# Altium PCB PC_ind_board.PcbDoc
Units mil, origin at the board's own origin, x right, y up, seen from the top; angles counter-clockwise.
Board outline 2800 x 730 mil, 2 copper layers (Top Layer, Bottom Layer), stack 61.811 mil thick; 5 components, 6 nets, 20 pads, 1 vias.
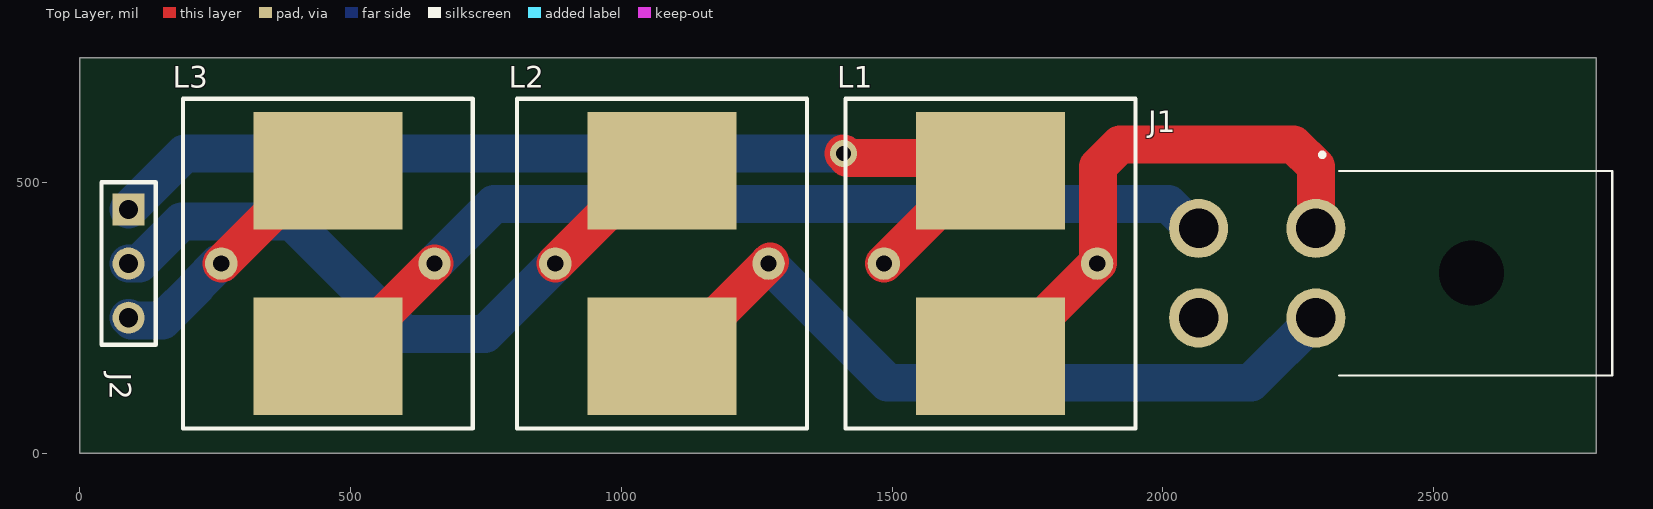
[diagram p0: Top Layer view]
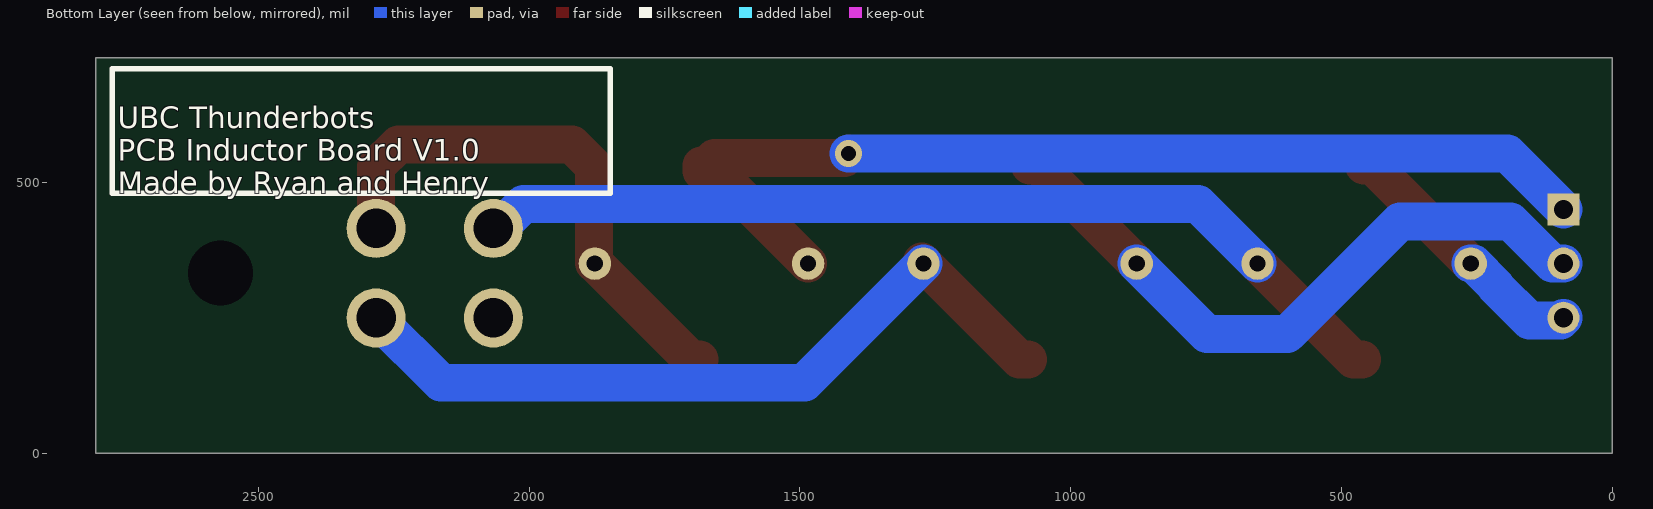
[diagram p1: Bottom Layer view, seen from below]

## Layer stack, top to bottom
Top Solder: solder mask 0.4, Solder Resist, Dk 3.5
Top Layer: signal copper 1.378
Dielectric 1: dielectric 59.0551, FR-4, Dk 4.8
Bottom Layer: signal copper 1.378
Bottom Solder: solder mask 0.4, Solder Resist, Dk 3.5

## Board outline
0,730 0,0 2800,0 2800,730

## Design rules (kind name [scope] priority, off if disabled: settings)
BoardOutlineClearance [All] p1: gap=7.87 ignorepadtopadclearanceinfootprint=FALSE except(15.75: Arc-SplitBarrior Arc-SplitContinuation Track-SplitBarrior Track-SplitContinuation SMDPad-SplitBarrior SMDPad-SplitContinuation THPad-SplitBarrior THPad-SplitContinuation Via-SplitBarrior Via-SplitContinuation Fill-SplitBarrior Fill-SplitContinuation Poly-SplitBarrior Poly-SplitContinuation Region-SplitBarrior Region-SplitContinuation Text-SplitBarrior Text-SplitContinuation)
Clearance "Clearance Bottom Layer" [OnLayer('Bottom Layer')] p1: gap=8 ignorepadtopadclearanceinfootprint=TRUE except(10: Arc-Text Track-Text SMDPad-Text THPad-Text Via-Text Fill-Text Poly-Text Region-Text Text-Text)
Clearance "Clearance Top Layer" [OnLayer('Top Layer')] p2: gap=8 ignorepadtopadclearanceinfootprint=TRUE except(10: Arc-Text Track-Text SMDPad-Text THPad-Text Via-Text Fill-Text Poly-Text Region-Text Text-Text)
Clearance [All] p3: gap=7.87 ignorepadtopadclearanceinfootprint=FALSE except(3.5: Arc-Arc Arc-Track Arc-SMDPad Track-Track Track-SMDPad SMDPad-SMDPad; 5: Arc-Via Track-Via SMDPad-Via THPad-Via Via-Via; 10: Arc-Text Track-Text SMDPad-Text THPad-Text Via-Text Fill-Text Poly-Text Region-Text Text-Text)
HoleSize [All] p1: absolutevalues=TRUE maxlimit=248.03 minlimit=7.87 maxpercent=80.000 minpercent=20.000
MinimumAnnularRing [All] p1: minimumring=3
MinimumSolderMaskSliver [All] p1: minsoldermaskwidth=3.94
PolygonConnect PolygonConnect_1 [All] p1: thpad.connectstyle=Relief thpad.reliefconductorwidth=20 thpad.reliefentries=4 thpad.polygonreliefangle="90 Angle" thpad.airgapwidth=10 smdpad.connectstyle=Relief smdpad.reliefconductorwidth=20 smdpad.reliefentries=4 smdpad.polygonreliefangle="90 Angle" smdpad.airgapwidth=10 via.connectstyle=Direct via.reliefconductorwidth=20 via.reliefentries=4 via.polygonreliefangle="90 Angle" via.airgapwidth=10
RoomDefinition SCH_Inductor_board [InComponentClass('SCH_Inductor_board')] p1: confinementstyle=ConfineIn formatcopy=TRUE lockcomponents=FALSE outline -5,-35 2880,-35 2880,760 -5,760
RoutingCorners [All] p1: cornerstyle=Round minsetback=100 maxsetback=100
RoutingVias [All] p1: holewidth=19.68 width=39.37 viastyle="Through Hole" minholewidth=7.87 minwidth=17.72 maxholewidth=39.37 maxwidth=78.74
SilkToSilkClearance [All] p1: silktosilkclearance=3.94
SilkToSolderMaskClearance [IsPad] p1: minsilkscreentomaskgap=3.94 clearancetoexposedcopper=TRUE
SolderMaskExpansion [All] p1: expansion=4 istentingtop=FALSE
Width [All] p1: maxlimit=100 minlimit=3.5 preferedwidth=15
25 further rules are at their usual default settings.

## Components (designator, comment, footprint, x,y, rotation, side; value= is the part's Value field where it differs from the comment)
J1 "CN HDR 4POS Molex 26013115 (R)" 26013115 2570,332.28 r90 top
J2 "Header 3" HDR1X3 90,450 r270 top
L1 "56 UH" "EATON _HCM1A1307V2-560-R"#1 1681.85,350 r90 top value="56 µH"
L2 "56 UH" "EATON _HCM1A1307V2-560-R"#2 1075,350 r90 top value="56 µH"
L3 "56 UH" "EATON _HCM1A1307V2-560-R"#2 458.15,350 r90 top value="56 µH"

## Footprints (in the part's own frame and the unit in brackets; to place one, negate y for a bottom-side part, rotate by r counter-clockwise, add the part's x,y. Pads: shape width x height; smd on the part's side, far side on the other; paste and mask are expansions set on the pad)
26013115 [mm]
  round 2.775 hole 1.85: 1(2.1,7.3) 2(-2.1,7.3) 3(2.1,12.8) 4(-2.1,12.8)
  round 1.525 hole 3.05 unplated: MH1(0,0)
  silkscreen extent -4.8,-6.6 5.6,7.05, body extent -4.8,-6.5 5.2,13.44, height 11.5
"EATON _HCM1A1307V2-560-R"#1 [mm] "FIXED IND 56UH 4A 65 mOHM SMD"
  rect 5.5x7 smd: 1(-4.35,0) 2(4.35,0)
  round 1.524 hole 0.762: 1(0,-5) 2(0,5)
  Top Layer lines w0.254: -4.6,0 -4.6,-0.4 ; 0,-4.6 0,-5 ; 0,5 0,4.6 0,5
  Top Layer lines w1.778: 0,5 4.6,0.4 4.6,0.25 4.6,0 ; -4.5,-0.1 -4.5,-0.5 0,-5
  silkscreen extent -7.73,-6.8 7.73,6.8
"EATON _HCM1A1307V2-560-R"#2 [mm] "FIXED IND 56UH 4A 65 mOHM SMD"
  rect 5.5x7 smd: 1(-4.35,0) 2(4.35,0)
  round 1.524 hole 0.762: 1(0,-5) 2(0,5)
  Top Layer lines w0.254: -4.6,0 -4.6,-0.4 ; 0,-4.6 0,-5 ; 0,5 0,4.6 0,5
  Top Layer lines w1.778: 0,5 4.6,0.4 4.6,0 ; -4.5,-0.1 -4.5,-0.5 0,-5
  silkscreen extent -7.73,-6.8 7.73,6.8
HDR1X3 [mm] "Connector; Header; 3 Position"
  rect 1.5x1.5 hole 0.9: 1(0,0)
  round 1.5 hole 0.9: 2(2.54,0) 3(5.08,0)
  silkscreen extent -1.27,-1.27 6.35,1.27

## Part data
J1: "Molex 26013115 4POS Minifit / dual row, right angle"
J2: "Header, 3-Pin", LatestRevisionDate=17-Jul-2002, LatestRevisionNote="Re-released for DXP Platform.", Publisher="Altium Limited"
L1 L2 L3: library part "IND 56UH 4A 65 mOHM SMD", "FIXED!! IND 56UH 4A 65 MOHM SMD Shielded - Inductor 65mOhm Max Nonstandard -", Current Rating=4A, DC Resistance=65mOhm, Digi-Key Part Number=283-HCM1A1307V2-560-RTR-ND, Supplier Part Number 1=283-HCM1A1307V2-560-RCT-ND, Supplier 1=Digi-Key

## Via types
v1: diameter 50, hole 28, Top Layer to Bottom Layer, 1 vias

## Nets (pads, with @x,y where several pads share a name; then routed paths per layer and width w, separated by ;. In a path a pad name is that pad's centre, name@x,y a point inside that pad or via, vN(x,y) a via of type N, cw(c..) or ccw(c..) an arc to the next point about the centre after c; other vN are vias at no path point)
"BOARD 1 CN": J1.1 L1.1 | length 721.6
  Top Layer w70: L1.1@1878.7,350 1880,351.3 1880,528.99 1921.01,570 2241.59,570 2282.6,528.99 2282.6,425.58 J1.1@2284.06,424.13
"BOARD 2 CN": J1.2 L2.1 | length 1156.8
  Top Layer w70: L2.1@1271.85,350 1271.85,350.89 L2.1@1275,354.03
  Bottom Layer w70: L2.1@1271.85,350 1491.85,130 2162.99,130 J1.2
"BOARD 3 CN": J1.3 L3.1 | length 1475.3
  Bottom Layer w70: L3.1@655,350 765,460 2010.4,460 2055.44,414.96 J1.3
"PHASE 1 MOTOR": J2.1 L1.2 | length 1647.7
  Top Layer w70: v1(1410,553) 1418,545 1658.11,545 1672.01,531.1 L1.2@1681.85,521.26
  Bottom Layer w70: J2.1 193,553 v1(1410,553)
"PHASE 2 MOTOR": J2.2 L2.2 | length 960.5
  Bottom Layer w70: J2.2 110,350 188,428 392,428 600,220 748.15,220 L2.2@878.15,350
"PHASE 3 MOTOR": J2.3 L3.2 | length 218
  Bottom Layer w70: J2.3 95.01,244.99 153,244.99 215,307 215,308.99 256.01,350 L3.2@261.3,350
pads on no net: J1.4 J1.MH1

## Silkscreen, mask and mechanical layers (free items; w line width, h text height)
Bottom Overlay:
  lines w10: 1850,480 1850,710 2770,710 2770,500 2770,480 1860,480 1850,480
  text "UBC Thunderbots  / PCB Inductor Board V1.0 / Made by Ryan and Henry" at 2760,480 h40
Mechanical 15:
  lines w10: 0,0 0,730 2790,730 2800,730 2800,0 0,0